# EAGLE board Teensyboard (EAGLE 9.6.2)
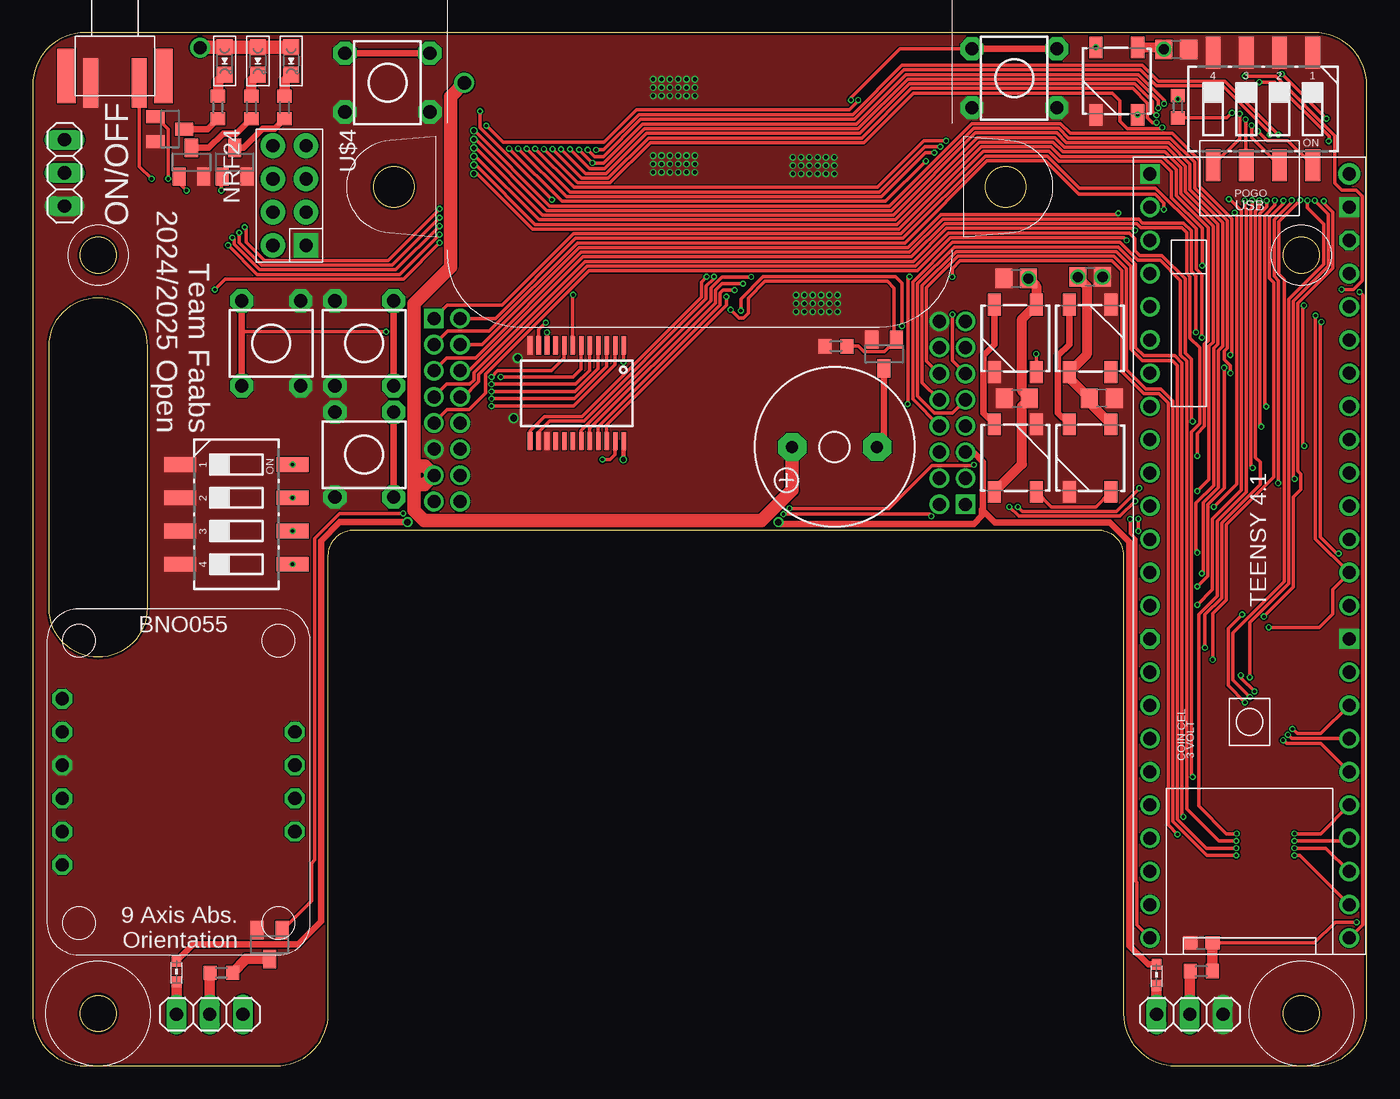
[diagram p0: board, top side]
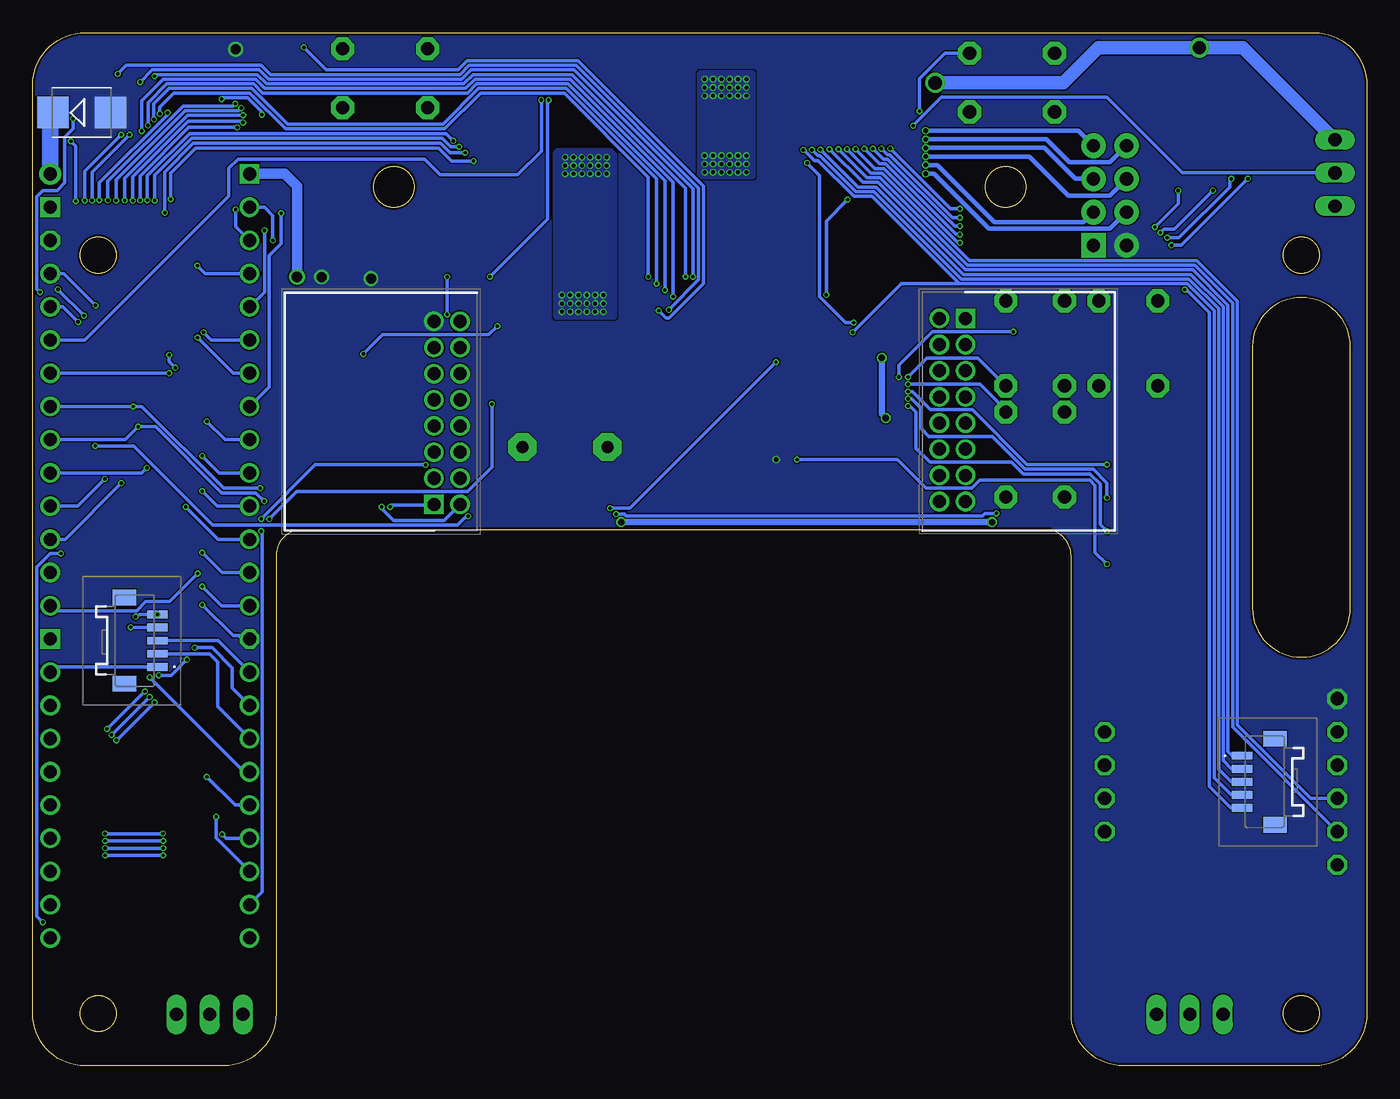
[diagram p1: board, bottom side, seen from below]

Size 102 x 79 mm. Coordinates in mm from the lower left corner, seen from the top.
Outline: 87.4,0 98,0 arc90 102,4 102,75 arc90 98,79 4,79 arc90 0,75 0,4 arc90 4,0 18.6,0 arc90 22.6,4 22.6,38.99 arc-90 24.6,40.99 81.4,40.99 arc-90 83.4,38.99 83.4,4 arc90 87.4,0
Outline: 8.75,35 arc-180 1.25,35 1.25,55 arc-180 8.75,55 8.75,35
Outline: circle at 5,62 radius 1.38
Outline: circle at 27.6,67.22 radius 1.55
Outline: circle at 74.4,67.22 radius 1.55
Outline: circle at 97,62 radius 1.38
Outline: circle at 5,4 radius 1.38
Outline: circle at 97,4 radius 1.38
Copper layers (1*16): Top 0.018mm / dielectric 1.55mm / Bottom 0.018mm
Design rules "Multi-CB_2L_100um-Tracks_OL35um": minimum track width 0.1mm, minimum drill 0.2mm, track to track 0.1mm, track to pad 0.1mm, pad to pad 0.1mm, via to via 0.1mm, smd to smd 0mil, copper to edge 0.2mm, drill to drill 0.2mm, minimum pad ring 0.125mm, minimum via ring 0.1mm, stop-mask expansion 2mil, vias tented up to drill 0.45mm, thermal gap 0.2mm
Net classes: 1 5v: width 0.813 mm, drill 0.8 mm

## Footprints (pad centres in the part's own frame; a part is rotated, then mirrored left to right if it is on the bottom)
C0805 = smd 1.3 x 1.5: 1 -0.95,0; 2 0.95,0
C0603 = smd 1.1 x 1: 1 -0.85,0; 2 0.85,0
SMB = smd 2.4 x 2.4: A 2.2,0; C -2.2,0
SPARKFUN-LED_WS2812B = smd 1.651 x 1: 1 -2.577,1.6; 2 -2.577,-1.6; 3 2.577,-1.6; 4 2.577,1.6
208659-1640_SHDRRA16W55P200_2X8_1800X1450X = drill 1 pad 1.5 square: 1 0,0 | drill 1 pad 1.5: 2 0,-2; 3 2,0; 4 2,-2; 5 4,0; 6 4,-2; 7 6,0; 8 6,-2; 9 8,0; 10 8,-2; 11 10,0; 12 10,-2; 13 12,0; 14 12,-2; 15 14,0; 16 14,-2
2035600503 = smd 0.6 x 1.55: 1 2,2.348; 2 1,2.348; 3 0,2.348; 4 -1,2.348; 5 -2,2.348 | smd 1.2 x 1.8: MP1 3.3,-0.177; MP2 -3.3,-0.177
1X03 = drill 1.016 long: 1 -2.54,0; 2 0,0; 3 2.54,0
KSM611A = drill 1.016 pad 1.778 octagon: A -3.25,2.25; B -3.25,-2.25; C 3.25,2.25; D 3.25,-2.25
0603 = smd 0.85 x 0.7: 1 -0.9,0; 2 0.7,0
POWER_DISTRIBUTION_CHIPLED_0805 = smd 1.2 x 1.2: A 0,-1.05; C 0,1.05
TIGERS_KT11 = smd 3.759 x 1.168: 1 3.581,1.854; 2 3.581,-1.854 | smd 4.191 x 1.422: MNT1 3.048,3.708; MNT2 3.048,-3.708
TRANSISTOR-SMALL-SIGNAL_SOT23 = smd 1 x 1.4: 1 -0.95,-1.1; 2 0.95,-1.1; 3 0,1.1
SOT23 = smd 1 x 1.4: 1 -0.95,-1.1; 2 0.95,-1.1; 3 0,1.1
R0603 = smd 1 x 1.1: 1 -0.85,0; 2 0.85,0
SWITCH-DIL_CTS-219-04 = smd 1.13 x 2.44: 1 -3.81,-4.3; 2 -1.27,-4.3; 3 1.27,-4.3; 4 3.81,-4.3; 5 3.81,4.3; 6 1.27,4.3; 7 -1.27,4.3; 8 -3.81,4.3
BUZZER_F/QMX = drill 0.914 pad 2.159 octagon: + 3.251,0; - -3.251,0
SPARKFUN_SSOP24 = smd 0.348 x 1.397: 1 -3.575,-3.656; 2 -2.925,-3.656; 3 -2.275,-3.656; 4 -1.625,-3.656; 5 -0.975,-3.656; 6 -0.325,-3.656; 7 0.325,-3.656; 8 0.975,-3.656; 9 1.625,-3.656; 10 2.275,-3.656; 11 2.925,-3.656; 12 3.575,-3.656; 13 3.575,3.656; 14 2.925,3.656; 15 2.275,3.656; 16 1.625,3.656; 17 0.975,3.656; 18 0.325,3.656; 19 -0.325,3.656; 20 -0.975,3.656; 21 -1.625,3.656; 22 -2.275,3.656; 23 -2.925,3.656; 24 -3.575,3.656
BNO055 = drill 1.016 octagon: 3VO -8.99,3.81; ADR 8.79,-3.81; GND -8.99,1.27; INT 8.79,-1.27; PS0 8.79,3.81; PS1 8.79,1.27; RST -8.99,-6.35; SCL -8.99,-3.81; SDA -8.99,-1.27; VIN -8.99,6.35
TEENSY_4.1_WO_EXTRAPINS = drill 1: 0-RX1/CS1/CRX2 -33.02,-7.62; 1-TX1/MISO1/CTX2 -30.48,-7.62; 2-OUT2 -27.94,-7.62; 3-LRCLK2 -25.4,-7.62; 4-BCLK2 -22.86,-7.62; 5-IN2 -20.32,-7.62; 6-OUT1D -17.78,-7.62; 7-RX2/OUT1A -15.24,-7.62; 8-TX2/IN2 -12.7,-7.62; 9-OUT1C -10.16,-7.62; 10-CS\MQSR -7.62,-7.62; 11-MOSI/CTX1 -5.08,-7.62; 12-MISO/MQSL -2.54,-7.62; 13-SCK/LED -2.54,7.62; 14-A0/TX3/SPDIF_OUT -5.08,7.62; 15-A1/RX3/SPDIF_IN -7.62,7.62; 16-A2/RX4/SCL1 -10.16,7.62; 17-A3/TX4/SDA1 -12.7,7.62; 18-A4/SDA0 -15.24,7.62; 19-A5/SCL0 -17.78,7.62; 20-A6/TX5/LRCLK1 -20.32,7.62; 21-A7/RX5/BCLK1 -22.86,7.62; 22-A8/CTX1 -25.4,7.62; 23-A9/CRX1/MCLK1 -27.94,7.62; 24-A10/TX6/SCL2 2.54,-7.62; 25-A11/RX6/SDA2 5.08,-7.62; 26-A12/MOSI1 7.62,-7.62; 27-A13/SCK1 10.16,-7.62; 28-RX7 12.7,-7.62; 29-TX7 15.24,-7.62; 30-CRX3 17.78,-7.62; 31-CTX3 20.32,-7.62; 32-OUT1B 22.86,-7.62; 33-MCLK2 22.86,7.62; 34-RX8 20.32,7.62; 35-TX8 17.78,7.62; 36-PWM 15.24,7.62; 37-PWM 12.7,7.62; 38-A14/CS/IN1 10.16,7.62; 39-A15/CS/OUT1A 7.62,7.62; 40-A16/CS1 5.08,7.62; 41-A17/MISO1 2.54,7.62 | drill 1 octagon: 3V3-1 0,-7.62; 3V3-3 -30.48,7.62 | drill 1 square: GND1 -35.56,-7.62; GND3 0,7.62; GND6 -33.02,7.62 | drill 1 pad 1.676: VIN -35.56,7.62
NRF24 = drill 1.016 pad 1.88 square: 1 3.81,1.27 | drill 1.016 pad 1.88: 2 3.81,-1.27; 3 1.27,1.27; 4 1.27,-1.27; 5 -1.27,1.27; 6 -1.27,-1.27; 7 -3.81,1.27; 8 -3.81,-1.27

## Placement (x,y rotation side)
C1  100n  [C0805]  75.19,60.2 0 top
C2  100n  [C0805]  80.84,60.33 180 top
C3  100n  [C0805]  87.42,77.73 180 top
C4  100n  [C0805]  75.26,51.03 0 top
C5  100n  [C0805]  81.73,51.06 180 top
C6  1n  [C0603]  89.35,9.4 180 top
D1  [SMB]  98.24,72.9 0 bottom
D6  [SPARKFUN-LED_WS2812B]  82.88,75.3 270 top
D7  [SPARKFUN-LED_WS2812B]  75.13,55.63 270 top
D8  [SPARKFUN-LED_WS2812B]  75.13,46.48 90 top
D9  [SPARKFUN-LED_WS2812B]  80.84,46.48 270 top
D10  [SPARKFUN-LED_WS2812B]  80.84,55.63 90 top
J1  TEENSY_CON_RIGHTANGLED  [208659-1640_SHDRRA16W55P200_2X8_1800X1450X]  30.68,57.15 270 bottom
J3  5PIN_1MM_CON  [2035600503]  94.81,32.52 270 bottom
J4  5PIN_1MM_CON  [2035600503]  7.19,21.72 90 bottom
J5  TEENSY_CON_RIGHTANGLED  [208659-1640_SHDRRA16W55P200_2X8_1800X1450X]  71.32,42.93 90 bottom
JP2  [1X03]  13.53,3.94 0 top
JP3  [1X03]  88.47,3.94 0 top
JP4  [1X03]  2.44,68.28 270 top
KNOPF-0  [KSM611A]  75.05,75.52 0 top
KNOPF-1  [KSM611A]  25.35,55.25 270 top
KNOPF-2  [KSM611A]  27.12,75.19 0 top
KNOPF-3  [KSM611A]  18.23,55.25 90 top
KNOPF-4  [KSM611A]  25.35,46.74 270 top
L6  120R  [0603]  10.99,7.12 270 top
L7  120R  [0603]  85.92,6.86 270 top
LED4  [POWER_DISTRIBUTION_CHIPLED_0805]  14.68,76.84 180 top
LED6  [POWER_DISTRIBUTION_CHIPLED_0805]  17.22,76.84 180 top
LED8  [POWER_DISTRIBUTION_CHIPLED_0805]  19.76,76.84 180 top
ON/OFF_SW  [TIGERS_KT11]  6.3,78.74 270 top
Q1  bss138  [TRANSISTOR-SMALL-SIGNAL_SOT23]  10.49,71.63 270 top
Q2  bss138  [TRANSISTOR-SMALL-SIGNAL_SOT23]  12.14,69.09 0 top
Q3  bss138  [TRANSISTOR-SMALL-SIGNAL_SOT23]  65.1,54.44 180 top
Q4  bss138  [TRANSISTOR-SMALL-SIGNAL_SOT23]  15.44,69.09 0 top
Q8  BSS138  [SOT23]  18.11,9.27 180 top
R1  10k  [R0603]  14.17,73.28 90 top
R3  10k  [R0603]  16.71,73.28 90 top
R4  10k  [R0603]  19.25,73.28 90 top
R6  5k  [R0603]  61.41,55.02 180 top
R13  470R  [R0603]  87.55,73.33 270 top
R15  1k  [R0603]  89.35,7.24 180 top
R16  47R  [R0603]  14.42,7.12 180 top
S1  DEBUG_DILSW  [SWITCH-DIL_CTS-219-04]  15.57,42.17 270 top
S2  DEBUG_DILSW  [SWITCH-DIL_CTS-219-04]  94.05,73.16 180 top
SG1  DEBUG_BUZZER  [BUZZER_F/QMX]  61.31,47.32 180 top
U$1  MULTIPLEXER_MUX-74HC4067SMD  [SPARKFUN_SSOP24]  41.6,51.44 180 top
U$2  BNO055  [BNO055]  11.25,21.72 0 top
U$3  TEENSY_4.1_WO_EXTRAPINS  [TEENSY_4.1_WO_EXTRAPINS]  93.04,32.64 270 top
U$4  NRF24  [NRF24]  19.63,66.55 270 top

## Library data of the parts
C1-C6 = rcl; SPICEPREFIX: C
D1 = diode
D6-D10 = Open24; PROD_ID: DIO-12503
J1 J5 = Open24; DESCRIPTION: IGRID2.0 PLUGTHOLEHDR RA GF NAT 16CKT; HEIGHT: 8.5mm; MANUFACTURER_NAME: Molex; MANUFACTURER_PART_NUMBER: 208659-1640; MOUSER_PART_NUMBER: 538-208659-1640; MOUSER_PRICE-STOCK: https://www.mouser.co.uk/ProductDetail/Molex/208659-1640?qs=GedFDFLaBXEVd%2F074iDEfw%3D%3D
J3 J4 = 5PinConnector; DESCRIPTION: Headers & Wire Housings PicoClasp Hdr SMT SR Vrt 5Ckt OPL Au0.38; HEIGHT: 5.61mm; MANUFACTURER_NAME: Molex; MANUFACTURER_PART_NUMBER: 203560-0503; MOUSER_PART_NUMBER: 538-203560-0503; MOUSER_PRICE-STOCK: https://www.mouser.co.uk/ProductDetail/Molex/203560-0503?qs=F5EMLAvA7IDMlfZodDQB8w%3D%3D
JP2-JP4 = pinhead
KNOPF-0 KNOPF-1-KNOPF-4 = schalter_taster
L6 L7 = wuerth-elektronik
LED4 LED6 LED8 = Open24; MF: Würth Elektronik; MPN: 150080GS75000
ON/OFF_SW Q1-Q4 U$1 = Open24
Q8 = transistor-small-signal
R1 R3 R4 R6 R13 R15 R16 = rcl; SPICEPREFIX: R
S1 S2 SG1 = Open24; OC_FARNELL: unknown; OC_NEWARK: unknown
U$2 U$3 = Libsammlung
U$4 = nrf24

## Nets
+3V3: J5.5 L6.1 L7.1
+5V: C1.2 C2.2 C3.2 C4.2 C5.2 D1.A D6.1 D7.1 D8.1 D9.1 D10.1 J5.15 U$1.24 U$2.VIN U$4.2
+12V: J1.13 JP4.1 LED4.A LED6.A LED8.A SG1.+
ALRT: J5.4
BODEN_0: J3.3 U$3.24-A10/TX6/SCL2
BODEN_1: J4.5 U$3.25-A11/RX6/SDA2
BODEN_2: J3.2 U$3.26-A12/MOSI1
BODEN_3: J4.3 U$3.27-A13/SCK1
BODEN_4: J3.1 U$3.41-A17/MISO1
BODEN_5: J4.1 U$3.40-A16/CS1
BUZZER: Q3.1 R6.1 U$3.33-MCLK2
CE: U$3.9-OUT1C U$4.3
COMMUNICATION_MOD: JP4.2 U$3.21-A7/RX5/BCLK1
CSN: U$3.8-TX2/IN2 U$4.4
D_OUTPUT: U$1.1 U$3.31-CTX3
DIP_0: S1.8 U$1.4
DIP_1: S1.7 U$1.3
DIP_2: S1.6 U$1.2
DIP_3: S1.5 U$1.23
DIP_4: S2.8 U$1.22
DIP_5: S2.7 U$1.21
DIP_6: S2.6 U$1.20
DIP_7: S2.5 U$1.19
DRIBBLER_DIR: J5.9 U$3.30-CRX3
DRIBBLER_PWM: J5.11 U$3.29-TX7
DRIVE_EN: J1.9 U$3.0-RX1/CS1/CRX2
EN_HV: J5.12 U$3.34-RX8
GND: C1.1 C2.1 C3.1 C4.1 C5.1 C6.2 D6.3 D7.3 D8.3 D9.3 D10.3 J1.11 J5.16 JP3.3 JP4.3 KNOPF-0.B KNOPF-0.D KNOPF-1.B KNOPF-1.D KNOPF-2.B KNOPF-2.D KNOPF-3.B KNOPF-3.D KNOPF-4.B KNOPF-4.D ON/OFF_SW.2 Q1.2 Q2.2 Q3.2 Q4.2 Q8.2 R6.2 S1.1 S1.2 S1.3 S1.4 S2.1 S2.2 S2.3 S2.4 U$1.12 U$1.15 U$2.GND U$3.GND1 U$3.GND3 U$3.GND6 U$4.1
HV_SENSING: J5.13
I2C_SCL: J5.2 U$2.SCL U$3.19-A5/SCL0
I2C_SDA: J5.1 U$2.SDA U$3.18-A4/SDA0
IR_ADC: C6.1 R15.1 U$3.22-A8/CTX1
IR_LED: Q8.1 U$3.23-A9/CRX1/MCLK1
IRQ: U$3.20-A6/TX5/LRCLK1 U$4.8
K0: KNOPF-0.A KNOPF-0.C U$3.32-OUT1B
K1: KNOPF-1.A KNOPF-1.C U$1.8
K2: KNOPF-2.A KNOPF-2.C U$1.7
K3: KNOPF-3.A KNOPF-3.C U$1.6
K4: KNOPF-4.A KNOPF-4.C U$1.5
LED1: Q1.1 U$3.37-PWM
LED2: Q2.1 U$3.10-CS\MQSR
LED_KICKERBOARD: J5.14
M_HL_DIR: J1.6 U$3.28-RX7
M_HL_PWM: J1.5 U$3.4-BCLK2
M_HR_DIR: J1.8 U$3.7-RX2/OUT1A
M_HR_PWM: J1.7 U$3.3-LRCLK2
M_VL_DIR: J1.4 U$3.6-OUT1D
M_VL_PWM: J1.1 U$3.2-OUT2
M_VR_DIR: J1.2 U$3.5-IN2
M_VR_PWM: J1.3 U$3.1-TX1/MISO1/CTX2
N$1: LED8.C R4.2
N$5: LED4.C R1.2
N$7: LED6.C R3.2
N$8: Q1.3 R1.1
N$9: Q4.3 R4.1
N$12: J1.10
N$13: Q2.3 R3.1
N$15: Q3.3 SG1.-
N$19: D6.4 R13.1
N$20: D6.2 D7.4
N$21: D7.2 D8.4
N$22: D8.2 D9.4
N$23: D9.2 D10.4
N$24: J1.12
N$25: J1.14
N$26: J1.16
N$40: JP3.2 R15.2
N$52: D1.C U$3.VIN
N$53: Q8.3 R16.1
N$54: JP2.2 R16.2
N$77: JP3.1 L7.2
N$96: JP2.1 L6.2
NEOPIXELS: R13.2 U$3.39-A15/CS/OUT1A
ON/OFF-BUTTON: ON/OFF_SW.1 U$3.17-A3/TX4/SDA1
S0: J4.4 U$1.10 U$3.16-A2/RX4/SCL1
S1: J4.2 U$1.11 U$3.15-A1/RX3/SPDIF_IN
S2: J3.4 U$1.14 U$3.14-A0/TX3/SPDIF_OUT
S3: J3.5 U$1.13 U$3.38-A14/CS/IN1
SCHUSS_1: J5.8 U$3.36-PWM
SCHUSS_2: J5.10 U$3.35-TX8
SPI_MISO: U$3.12-MISO/MQSL U$4.7
SPI_MOSI: U$3.11-MOSI/CTX1 U$4.6
SPI_SCK: U$3.13-SCK/LED U$4.5
T_EN: Q4.1 U$3.3V3-1

## Tracks (layer width: path | path; a pad name or v marks a point on that pad's centre or on a via)
+3V3  (via drill 0.51)
  Top 0.508: L7.1 85.28,7.76 83.85,9.19 83.85,40.07 82.37,41.56 73.58,41.56 72.67,42.47 | J5.5 71.9,46.93 72.67,46.17 72.67,42.47 | 72.67,42.47 72.59,42.55 72.59,42.08 71.95,41.44 57.14,41.44 v57.01,41.57 | v28.65,41.57 23.48,41.57 22.04,40.13 22.04,11.05 20.28,9.29 12.27,9.29 L6.1
  Bottom 0.508: v57.01,41.57 v28.65,41.57
+5V  (via drill 0.36, 0.76)
  Top 0.356: U$1.24 45.18,46.38 v45.16,46.36
  Top 0.762: C1.2 76.73,59.61 D7.1 75.64,57.11 75.64,51.6 C4.2 75.64,50.46 75.64,46.02 D8.1 | D9.1 80.78,50.72 C5.2 79.25,52.6 D10.1 80.59,54.4 80.59,59.63 C2.2 | D6.1 86.32,77.88 C3.2
  other vias: 76.14,60.2 86.47,77.73 79.89,60.33
  pour Bottom (rank 2, no thermals): -3.74,76.84 -3.74,-1.65 -1.45,-3.93 103.96,-3.93 105.86,-2.03 105.86,77.6 102.05,81.41 0.84,81.41
+12V  (via drill 1.02)
  Top 1.016: SG1.+ 58.06,44.02 55.74,41.7 29.92,41.7 29.16,42.46 29.16,44.45 | 29.16,44.45 29.16,45.85 | 29.16,45.85 29.16,58.3 31.95,61.09 31.95,74.12 v32.99,75.16 | LED8.A LED6.A LED4.A 12.83,77.89 v12.8,77.85 | 29.16,44.45 29.98,44.45 J1.13 29.98,45.85 29.16,45.85
  Bottom 1.016: JP4.1 9.47,77.85 v12.8,77.85 20.52,77.85 23.21,75.16 v32.99,75.16
BODEN_0
  Bottom 0.254: J3.3 87.83,32.52 U$3.24-A10/TX6/SCL2
BODEN_1  (via drill 0.25)
  Top 0.254: v13.92,59.35 14.73,60.16 28.34,60.16 v31.11,62.93 | v39.09,70.11 41.67,67.52 44.14,67.52 47.22,70.6 63.55,70.6 67.34,74.38 82.54,74.38 83.11,73.81 83.11,72.24 83.69,71.66 86.26,71.66 v86.36,71.76 | v93.79,66.18 93.79,65.67 93.48,65.36 93.48,46.53 93.85,46.16 93.85,44.47 90.91,41.53 90.91,35.78 89.63,34.5 v89.63,31.98
  Bottom 0.254: U$3.25-A11/RX6/SDA2 86.75,28.89 86.75,30.44 88.28,31.98 v89.63,31.98 | J4.5 10.39,19.72 12.03,21.36 12.03,57.6 13.78,59.35 v13.92,59.35 | v31.11,62.93 31.13,62.95 31.27,62.95 36.93,68.61 37.6,68.61 v39.09,70.11 | v86.36,71.76 90.06,71.76 93.79,68.03 v93.79,66.18
BODEN_2
  Bottom 0.254: U$3.26-A12/MOSI1 87.86,27.47 87.86,30.9 88.48,31.52 J3.2
BODEN_3  (via drill 0.25)
  Top 0.254: v42.43,70.05 42.94,69.54 43.65,69.54 46.48,72.37 62.82,72.37 66.61,76.15 84.7,76.15 85.92,74.93 91,74.93 94.6,71.34 v94.6,71.2 | v97.47,66.17 97.47,65.61 98.7,64.37 98.7,61.3 96.03,58.62 96.03,36.89 93.05,33.91 v93.05,29.71
  Bottom 0.254: J4.3 10.36,21.72 11.32,22.68 11.32,57.89 13.59,60.16 30.99,60.16 37.68,66.84 39.08,66.84 41.82,69.59 41.97,69.59 v42.43,70.05 | v94.6,71.2 97.47,68.33 v97.47,66.17 | U$3.27-A13/SCK1 85.82,22.48 v93.05,29.71
BODEN_4
  Bottom 0.254: J3.1 100.24,30.52 U$3.41-A17/MISO1
BODEN_5  (via drill 0.25)
  Top 0.254: U$3.40-A16/CS1 98.5,25.4 96.67,25.4 v96.31,25.76 | v41.08,70.09 42.58,68.59 43.7,68.59 46.78,71.66 63.11,71.66 66.9,75.44 84.4,75.44 86.05,73.8 v86.05,73.24 | v95.63,66.16 95.63,65.93 94.56,64.87 94.56,60.23 94.89,59.9 94.89,45.01 91.26,41.38 91.26,35.63 90.22,34.59 v90.22,31.06 | v93.42,28.63 92.37,29.68 v92.37,29.86
  Bottom 0.254: J4.1 10.3,23.72 10.61,24.04 10.61,58.18 13.3,60.87 30.7,60.87 37.38,67.55 38.54,67.55 v41.08,70.09 | v86.05,73.24 86.25,73.04 90.35,73.04 95.63,67.76 v95.63,66.16 | v90.22,31.06 91.41,29.86 v92.37,29.86 | v93.42,28.63 96.29,25.76 v96.31,25.76
BUZZER  (via drill 0.25)
  Top 0.254: U$3.33-MCLK2 101.67,10.8 101.67,58.93 v101.44,59.16 | v98.92,72.43 v95.5,75.85 | v53.37,57.81 53.98,57.19 54.34,57.19 54.71,57.56 54.71,58.71 55.99,59.99 65.33,59.99 65.86,59.46 65.86,55.72 Q3.1 65.12,54.61 63.55,54.61 63.14,55.02 R6.1
  Bottom 0.254: v101.44,59.16 101.67,59.39 101.67,66.47 101.22,66.93 100.12,66.93 99.54,67.52 99.54,71.02 98.92,71.64 v98.92,72.43 | v95.5,75.85 94.84,76.51 84.53,76.51 83.82,75.8 69.34,75.8 68.64,76.51 60.47,76.51 51.08,67.11 51.08,60.13 53.37,57.84 v53.37,57.81
CE  (via drill 0.25, 0.36)
  Top 0.254: v33.73,68.88 33.88,68.88 38.42,64.34 66.09,64.34 72.38,70.63 78,70.63 78.75,69.89 86.55,69.89 87.78,68.66 87.78,66.69 90.25,64.21 90.25,55.34 89.94,55.03 89.94,44.84 v89.04,43.95
  Bottom 0.254: v89.04,43.95 87.9,42.8 U$3.9-OUT1C
  Bottom 0.356: U$4.3 21.66,64.52 28.47,64.52 32.84,68.88 v33.73,68.88
COMMUNICATION_MOD  (via drill 0.25)
  Top 0.254: v34.68,71.89 35.95,70.62 43.67,70.62 46.16,73.1 62.45,73.1 63.11,73.76 v63.11,73.85
  Bottom 0.254: JP4.2 14.09,68.28 19.87,74.05 32.52,74.05 v34.68,71.89 | U$3.21-A7/RX5/BCLK1 98.02,55.5 87.02,66.5 87.02,68.63 86.31,69.34 72.03,69.34 70.84,68.15 64.92,68.15 63.11,69.96 v63.11,73.85
CSN  (via drill 0.25, 0.36)
  Top 0.254: v33.73,68.23 33.98,68.23 38.22,63.98 66.23,63.98 72.53,70.28 77.86,70.28 78.6,69.53 86.41,69.53 87.42,68.52 87.42,66.54 89.87,64.09 89.87,55.47 89.58,55.18 89.58,48.91 89.04,48.37 v89.04,46.64
  Bottom 0.254: v89.04,46.64 87.74,45.34 U$3.8-TX2/IN2
  Bottom 0.356: U$4.4 19.63,64.01 28.88,64.01 33.09,68.23 v33.73,68.23
D_OUTPUT  (via drill 0.25)
  Top 0.254: U$1.1 v45.18,53.83 v45.17,53.82 | v57.86,42.63 65.46,42.63 68.74,45.91 71.91,45.91 v71.96,45.96 | v84.53,41.82 v84.53,40.89
  Bottom 0.254: U$3.31-CTX3 84.44,13.3 84.44,40.8 v84.53,40.89 | v45.17,53.82 56.33,42.66 57.83,42.66 v57.86,42.63 | v71.96,45.96 80.39,45.96 v84.53,41.82
DIP_0  (via drill 0.25)
  Top 0.254: U$1.4 43.23,53.32 41.47,51.56 v35.07,51.56
  Bottom 0.254: S1.8 25.98,45.98 30.17,50.17 33.35,50.17 34.74,51.56 v35.07,51.56
  other vias: 19.87,45.98
DIP_1  (via drill 0.25)
  Top 0.254: U$1.3 43.88,53.47 41.41,51.01 v35.07,51.01
  Bottom 0.254: S1.7 19.87,44.58 20.91,45.62 26.13,45.62 28.64,48.14 33.47,48.14 34.11,48.77 34.11,50.3 34.82,51.01 v35.07,51.01
  other vias: 19.87,43.44
DIP_2  (via drill 0.25)
  Top 0.254: U$1.2 44.53,53.62 41.36,50.46 v35.07,50.46
  Bottom 0.254: S1.6 20.38,41.41 20.38,44.49 21.16,45.27 26.27,45.27 27.18,46.18 33.42,46.18 34.46,47.22 34.46,49.98 34.94,50.46 v35.07,50.46
  other vias: 19.87,40.9
DIP_3  (via drill 0.25)
  Top 0.254: U$1.23 44.53,46.74 44.14,46.36 v43.56,46.36
  Bottom 0.254: S1.5 20.77,39.26 20.77,44.39 21.19,44.8 29.57,44.8 30.2,44.18 33.7,44.18 35.89,46.36 v43.56,46.36
  other vias: 19.87,38.36
DIP_4  (via drill 0.25)
  Top 0.254: U$1.22 43.88,49.01 53.03,58.17 v53.03,58.82 | S2.8 95.98,70.74 94.41,70.74 v93.67,71.48
  Bottom 0.254: v53.03,58.82 53.03,67.57 60.91,75.44 68.19,75.44 68.9,74.74 84.26,74.74 84.97,75.44 92.02,75.44 93.67,73.8 v93.67,71.48
DIP_5  (via drill 0.25)
  Top 0.254: U$1.21 43.23,48.87 52.55,58.19 52.55,59.09 52.78,59.31 v53.67,59.31 | S2.7 93.19,70.99 v93.19,71.91
  Bottom 0.254: v53.67,59.31 53.67,67.7 61.06,75.09 68.05,75.09 68.76,74.38 84.41,74.38 85.12,75.09 91.74,75.09 93.19,73.65 v93.19,71.91
DIP_6  (via drill 0.25)
  Top 0.254: U$1.20 42.58,48.72 52.2,58.34 52.2,59.31 52.7,59.82 v54.3,59.82 | S2.6 92.73,68.91 v92.73,72.37
  Bottom 0.254: v54.3,59.82 54.3,67.84 61.2,74.74 67.9,74.74 70.64,72 82.53,72 85.26,74.74 91.58,74.74 92.73,73.59 v92.73,72.37
DIP_7  (via drill 0.25)
  Top 0.254: U$1.19 41.93,48.59 51.84,58.5 51.84,59.46 52.71,60.33 v54.94,60.33 | v92.28,72.8 92.28,70.89 S2.5
  Bottom 0.254: v54.94,60.33 54.94,67.97 61.35,74.38 67.75,74.38 70.49,71.65 82.67,71.65 85.41,74.38 91.21,74.38 92.28,73.32 v92.28,72.8
DRIBBLER_DIR  (via drill 0.25)
  Top 0.254: J5.9 70.31,49.91 68.95,49.91 67.64,51.23 67.64,59.8 70.46,62.62 82.99,62.62 84.32,61.29 84.32,54.94 84.97,54.29 87.33,54.29 87.88,53.74 87.88,19.15 v87.98,19.05
  Bottom 0.254: v87.98,19.05 87.98,17.42 U$3.30-CRX3
DRIBBLER_PWM  (via drill 0.25)
  Top 0.254: J5.11 70.3,53.95 70.3,57.44 v70.32,57.45 | v87.52,17.7 86.81,18.41 86.81,50.68 86.09,51.4 84.95,51.4 83.26,53.09 83.26,60.8 82.5,61.56 70.9,61.56 70.3,60.96 v70.3,60.33
  Bottom 0.254: v87.52,17.7 87.22,17.4 U$3.29-TX7 | v70.32,57.45 70.32,60.31 v70.3,60.33
DRIVE_EN  (via drill 0.25)
  Top 0.254: J1.9 31.7,50.17 33.35,50.17 34.62,51.44 34.62,52.89 42.52,60.8 67.64,60.8 70.17,63.33 83.42,63.33 v83.63,63.12
  Bottom 0.254: v83.63,63.12 83.63,65.02 84.27,65.66 U$3.0-RX1/CS1/CRX2
EN_HV  (via drill 0.25)
  Top 0.254: J5.12 68.34,53.91 68.34,59.5 70.75,61.91 82.64,61.91 83.61,60.94 83.61,53.24 85.09,51.75 86.24,51.75 87.17,50.82 87.17,18.7 89.77,16.1 v92.02,16.1 | v96.47,16.1 96.88,16.1 U$3.34-RX8
  Bottom 0.254: v92.02,16.1 v96.47,16.1
GND  (via drill 0.3, 0.51, 0.81)
  Bottom 0.508: v36.78,49.53 37.08,49.84 v37.08,54.13
  Bottom 0.813: v81.8,60.33 81.8,67.25 82.75,68.2 U$3.GND1
  other vias: 58.75,68.2 58.11,68.84 58.11,69.47 58.75,69.47 59.38,69.47 60.02,69.47 60.65,69.47 61.29,69.47 61.29,68.84 60.65,68.84 60.02,68.84 59.38,68.84 58.75,68.84 58.11,68.2 59.38,68.2 60.02,68.2 60.65,68.2 61.29,68.2 48.08,68.33 47.44,68.96 47.44,69.6 48.08,69.6 48.71,69.6 49.35,69.6 49.98,69.6 50.62,69.6 50.62,68.96 49.98,68.96 49.35,68.96 48.71,68.96 48.08,68.96 47.44,68.33 48.71,68.33 49.35,68.33 49.98,68.33 50.62,68.33 48.08,74.17 47.44,74.81 47.44,75.44 48.08,75.44 48.71,75.44 49.35,75.44 49.98,75.44 50.62,75.44 50.62,74.81 49.98,74.81 49.35,74.81 48.71,74.81 48.08,74.81 47.44,74.17 48.71,74.17 49.35,74.17 49.98,74.17 50.62,74.17 59,57.66 58.37,58.3 58.37,58.93 59,58.93 59.64,58.93 60.27,58.93 60.91,58.93 61.54,58.93 61.54,58.3 60.91,58.3 60.27,58.3 59.64,58.3 59,58.3 58.37,57.66 59.64,57.66 60.27,57.66 60.91,57.66 61.54,57.66
  pour Top (no thermals): -3.1,68.96 -3.1,-1.01 -0.94,-3.17 102.69,-3.17 104.85,-1.01 104.85,77.47 101.67,80.65 0.96,80.65 -2.59,77.09 -3.1,76.58
  pour Bottom (no thermals): 57.35,57.28 57.35,69.73 57.73,70.11 61.92,70.11 62.18,69.85 62.18,57.28 62.05,57.15 57.48,57.15
  pour Bottom (no thermals): 46.81,75.95 46.81,67.95 46.94,67.82 51,67.82 51.13,67.95 51.13,75.95 51,76.08 46.94,76.08
I2C_SCL  (via drill 0.25)
  Top 0.254: v75.32,42.75 75.67,42.39 82.86,42.39 84.62,44.16 v84.61,44.17 | v40.4,70.1 42.27,68.23 43.85,68.23 46.92,71.31 63.26,71.31 67.05,75.09 84.26,75.09 85.59,73.75 85.59,72.99 85.9,72.69 v85.92,72.69 | v94.97,66.17 94.97,65.79 94.19,65.01 94.19,50.54 v94.31,50.42
  Bottom 0.254: v75.32,42.75 75.32,42.62 74.39,41.7 70.55,41.7 J5.2 | U$2.SCL 10.26,25.91 10.26,58.33 13.15,61.22 30.55,61.22 37.24,67.91 38.21,67.91 v40.4,70.1 | v85.92,72.69 90.16,72.69 94.97,67.88 v94.97,66.17 | U$3.19-A5/SCL0 v94.32,50.42 v94.31,50.42 93.65,50.42 87.41,44.17 v84.61,44.17
I2C_SDA  (via drill 0.25)
  Top 0.254: v74.68,42.75 75.38,42.04 83.13,42.04 84.29,43.2 v84.3,43.18 | v39.75,70.11 41.98,67.88 44,67.88 47.07,70.95 63.41,70.95 67.19,74.74 84.11,74.74 85.24,73.61 85.24,72.49 85.59,72.13 v85.92,72.13 | v94.34,66.16 94.34,65.68 93.83,65.17 93.83,48.97 v93.93,48.87
  Bottom 0.254: J5.1 71.37,42.88 74.55,42.88 v74.68,42.75 | U$2.SDA 4.3,20.45 9.91,26.06 9.91,58.48 13,61.57 30.4,61.57 37.09,68.26 37.9,68.26 v39.75,70.11 | v85.92,72.13 86.01,72.22 90.12,72.22 94.34,67.99 v94.34,66.16 | U$3.18-A4/SDA0 94.92,47.88 v93.93,48.87 92.61,48.87 87.55,43.82 84.94,43.82 v84.3,43.18
IR_ADC  (via drill 0.25)
  Top 0.254: v99.85,39.17 99.71,39.17 98.43,40.45 98.43,56.78 v98.53,56.89 | v101.22,10.99 99.58,10.99 97.99,9.4 C6.1
  Top 0.813: R15.1 C6.1
  Bottom 0.254: v99.85,39.17 100.65,39.17 101.67,38.15 101.67,11.44 v101.22,10.99 | U$3.22-A8/CTX1 99.69,58.04 v98.53,56.89
IR_LED  (via drill 0.25)
  Top 0.254: Q8.1 21.31,12.63 21.31,15.5 21.56,15.75 21.56,40.33 23.48,42.25 v28.32,42.25 | v57.4,42.18 68.55,42.18 v68.7,42.03 | v97.22,47.4 97.12,47.5 97.12,58.07 v97.19,58.14
  Bottom 0.254: v28.32,42.25 29.2,42.25 29.4,42.05 56.63,42.05 56.76,42.18 v57.4,42.18 | v68.7,42.03 68.84,42.03 69.52,41.34 88.23,41.34 94.28,47.4 v97.22,47.4 | U$3.23-A9/CRX1/MCLK1 99.63,60.58 v97.19,58.14
IRQ  (via drill 0.25, 0.36)
  Top 0.254: v33.73,70.85 33.85,70.85 39.3,65.4 65.65,65.4 71.94,71.7 78.44,71.7 79.19,70.95 86.99,70.95 88.84,69.11 88.84,67.13 91.34,64.63 91.34,54.88 91.11,54.66 91.11,54.01 91.58,53.55 v91.58,52.96
  Bottom 0.254: U$3.20-A6/TX5/LRCLK1 v91.58,52.96
  Bottom 0.356: U$4.8 19.63,69.09 22.75,69.09 24.51,70.85 v33.73,70.85
K0  (via drill 0.25)
  Top 0.254: U$3.32-OUT1B 84.43,10.77 84.43,14.02 84.34,14.11 84.34,40.27 83.91,40.7 v83.91,41.8 | v66.9,50.6 66.93,50.63 66.93,60.23 v67.04,60.34 | v62.56,73.85 62.56,74.03 66.29,77.77 KNOPF-0.A
  Top 0.508: KNOPF-0.C KNOPF-0.A
  Bottom 0.254: v83.91,41.8 81.8,43.91 68.77,43.91 66.9,45.78 v66.9,50.6 | v67.04,60.34 67.04,60.35 62.63,64.76 62.63,73.85 v62.56,73.85
K1  (via drill 0.25)
  Top 0.254: v35.07,52.67 35.55,53.16 39.68,53.16 40.63,54.1 U$1.8
  Top 0.508: KNOPF-1.A KNOPF-1.C
  Bottom 0.254: KNOPF-1.C 29.73,54.13 33.61,54.13 v35.07,52.67
K2  (via drill 0.25)
  Top 0.254: U$1.7 41.28,58.91 v41.32,58.96 | v39.7,66.23 34.23,71.7 34.23,71.71 34.21,71.73 v34.21,73
  Top 0.508: KNOPF-2.C KNOPF-2.A
  Bottom 0.254: v41.32,58.96 41.32,64.61 v39.7,66.23 | v34.21,73 34.21,75.47 32.24,77.44 KNOPF-2.C
K3  (via drill 0.25)
  Top 0.254: U$1.6 41.93,53.29 41.31,52.67 v35.78,52.67 | v27.02,56.14 15.98,56.14
  Top 0.508: KNOPF-3.C 15.98,56.14 KNOPF-3.A
  Bottom 0.254: v35.78,52.67 35.78,53.57 33.22,56.14 v27.02,56.14
K4  (via drill 0.25)
  Top 0.254: U$1.5 42.58,53.17 41.52,52.12 v35.07,52.12
  Top 0.508: KNOPF-4.A KNOPF-4.C
  Bottom 0.254: KNOPF-4.A 27.6,50.13 29.59,52.13 v35.06,52.13 v35.07,52.12
LED1  (via drill 0.25)
  Top 0.254: Q1.1 10.36,71.61 v10.36,67.82 | v69.39,70.28 68.2,70.28 64.73,66.82 41.09,66.82 v37.77,70.14 | v31.11,64.22 27.77,60.87 17.34,60.87 15.39,62.81 15.39,63.2 v15.26,63.32 | v92.68,66.17 92.68,65.63 92.77,65.54 92.77,43.89 90.55,41.67 90.55,35.92 89.15,34.52 89.15,19.88 91.27,17.76 v92.05,17.76 | v96.47,17.76 98.47,17.76 U$3.37-PWM
  Bottom 0.254: v69.39,70.28 70.05,70.28 70.68,70.92 89.86,70.92 92.68,68.1 v92.68,66.17 | v37.77,70.14 36.96,69.32 36.64,69.32 31.51,64.19 31.14,64.19 v31.11,64.22 | v92.05,17.76 v96.47,17.76 | v10.36,67.82 10.49,67.7 10.49,67.21 14.37,63.32 v15.26,63.32
LED2  (via drill 0.25)
  Top 0.254: v68.93,69.83 68.25,69.83 64.88,66.46 40.8,66.46 v37.12,70.14 | v91.89,65.23 91.89,65.21 92.06,65.04 92.06,44.5 v90.3,42.74 | v31.11,64.86 27.48,61.22 17.51,61.22 15.78,62.95 v15.78,63.72 | v11.76,66.93 11.19,67.5 Q2.1
  Bottom 0.254: v68.93,69.83 70.1,69.83 70.81,70.54 89.73,70.54 91.92,68.35 91.92,65.26 v91.89,65.23 | v90.3,42.74 87.82,40.26 U$3.10-CS\MQSR | v37.12,70.14 37.09,70.14 36.64,69.69 36.5,69.69 31.69,64.88 31.13,64.88 v31.11,64.86 | v15.78,63.72 15.52,63.97 14.72,63.97 v11.76,66.93
M_HL_DIR  (via drill 0.25)
  Top 0.254: J1.6 33.37,53.15 42.08,61.86 67.2,61.86 69.73,64.39 84.42,64.39 84.71,64.1 87.84,64.1 88.23,63.71 88.23,60.61 88.49,60.36 88.49,55.66 89.23,54.92 89.23,49.1 88.58,48.46 88.58,22.2 v88.68,22.1
  Bottom 0.254: v88.68,22.1 86.53,19.94 U$3.28-RX7
M_HL_PWM  (via drill 0.25)
  Top 0.254: J1.5 31.66,54.13 33.85,54.13 41.94,62.21 67.05,62.21 69.58,64.75 84.56,64.75 84.85,64.45 87.99,64.45 88.59,63.86 88.59,60.76 88.94,60.4 v88.94,56.09
  Bottom 0.254: v88.94,56.09 88.36,55.5 U$3.4-BCLK2
M_HR_DIR  (via drill 0.25)
  Top 0.254: J1.8 32.93,51.15 34.08,52.31 34.08,52.86 42.37,61.15 67.49,61.15 70.02,63.68 83.84,63.68 84.27,63.25 84.27,62.34 84.66,61.95 86.34,61.95 88.11,60.19 88.11,54.51 88.59,54.03 88.59,49.37 v88.68,49.28
  Bottom 0.254: v88.68,49.28 87.29,47.88 U$3.7-RX2/OUT1A
M_HR_PWM  (via drill 0.25)
  Top 0.254: J1.7 31.66,52.13 33.4,52.13 33.73,52.45 33.73,53.01 42.23,61.51 67.34,61.51 69.87,64.04 84.13,64.04 v84.28,63.88
  Bottom 0.254: v84.28,63.88 84.28,59.18 U$3.3-LRCLK2
M_VL_DIR  (via drill 0.25)
  Top 0.254: J1.4 34.37,55.15 41.79,62.57 66.9,62.57 69.43,65.1 82.9,65.1 v83,65.2
  Bottom 0.254: v83,65.2 83,62.87 83.93,61.95 83.93,51.91 U$3.6-OUT1D
M_VL_PWM  (via drill 0.25)
  Top 0.254: J1.1 31.7,58.17 35.89,58.17 41.35,63.63 66.38,63.63 72.68,69.93 77.71,69.93 78.46,69.18 86.26,69.18 87.07,68.37 87.07,66.39 89.42,64.05 v89.42,61.19
  Bottom 0.254: v89.42,61.19 88.81,60.58 U$3.2-OUT2
M_VR_DIR  (via drill 0.25)
  Top 0.254: J1.2 35.37,57.15 41.49,63.28 66.53,63.28 72.82,69.57 77.56,69.57 80.02,67.12 85.84,67.12 88.96,64 88.96,60.92 89.4,60.49 v89.4,55.69
  Bottom 0.254: v89.4,55.69 86.68,52.97 U$3.5-IN2
M_VR_PWM  (via drill 0.25)
  Top 0.254: J1.3 31.7,56.18 34.89,56.18 41.64,62.92 66.67,62.92 72.97,69.22 77.42,69.22 80,66.64 85.82,66.64 86.48,65.98 v86.48,65.48
  Bottom 0.254: v86.48,65.48 86.48,64.19 U$3.1-TX1/MISO1/CTX2
N$1
  Top 0.813: LED8.C 19.25,75.28 R4.2
N$5
  Top 0.813: LED4.C 14.17,75.28 R1.2
N$7
  Top 0.813: R3.2 16.71,75.28 LED6.C
N$8
  Top 0.508: R1.1 13.37,71.63 Q1.3
N$9
  Top 0.508: R4.1 18.49,71.67 17.6,71.67 16.12,70.19 Q4.3
N$13
  Top 0.508: R3.1 15.57,71.29 14.55,71.29 13.45,70.19 Q2.3
N$15
  Top 0.508: Q3.3 65.1,47.86 SG1.-
N$19  (via drill 0.25)
  Top 0.254: v87.55,73.93 R13.1
  Bottom 0.254: D6.4 84.48,72.95 85.55,74.03 87.45,74.03 v87.55,73.93
  other vias: 84.48,72.72
N$20  (via drill 0.25)
  Top 0.254: v54.14,57.75 54.14,58.64 55.84,60.35 65.97,60.35 66.47,59.84 v66.47,56.56 | v76.73,54.44 D7.4 | D7.4
  Bottom 0.254: D6.2 79.55,76.15 69.49,76.15 68.78,76.86 60.32,76.86 50.72,67.26 50.72,59.81 53.34,57.2 53.58,57.2 v54.14,57.75 | v66.47,56.56 67.13,55.91 75.26,55.91 v76.73,54.44
  other vias: 81.28,77.88
N$21
  Top 0.508: D8.4 72.68,49.92 72.68,54.3 73.53,55.16 D7.2
N$22
  Top 0.254: D8.2 77.89,42.75 81.28,42.75 D9.4
N$23
  Top 0.508: D10.4 79.25,55.16 78.39,54.3 78.39,49.92 D9.2
N$40
  Top 0.813: R15.2 88.47,7.2 JP3.2
N$52
  Bottom 1.27: D1.C 100.66,72.69 U$3.VIN
N$53
  Top 0.813: Q8.3 16.33,8.17 R16.1
N$54
  Top 0.813: JP2.2 13.53,7.08 R16.2
N$77
  Top 0.813: JP3.1 L7.2
N$96
  Top 0.813: L6.2 JP2.1
NEOPIXELS  (via drill 0.25)
  Top 0.254: R13.2 91.3,72.48 v91.69,72.87 | v96.91,66.19 95.29,64.57 95.29,60.52 95.67,60.14 95.67,37.03 91.75,33.11 91.75,29.51 v93.06,28.2 | v95.97,25.32 96.27,25.02 U$3.39-A15/CS/OUT1A
  Bottom 0.254: v96.91,66.19 96.91,67.52 91.69,72.74 v91.69,72.87 | v93.06,28.2 95.95,25.32 v95.97,25.32
ON/OFF-BUTTON  (via drill 0.25)
  Top 0.254: v69.84,70.73 68.15,70.73 64.59,67.17 41.38,67.17 v38.42,70.13 | v31.11,63.58 28.05,60.51 17.16,60.51 v14.93,62.74 | v93.23,66.19 93.23,65.63 93.12,65.52 93.12,45.87 v93.28,45.72 | v9.09,67.82 8.15,68.76 ON/OFF_SW.1
  Bottom 0.254: v69.84,70.73 70.4,71.29 90.01,71.29 93.23,68.07 v93.23,66.19 | v31.11,63.58 31.12,63.58 31.4,63.58 36.78,68.97 37.26,68.97 v38.42,70.13 | v93.28,45.72 93.66,45.34 U$3.17-A3/TX4/SDA1 | v9.09,67.82 14.17,62.74 v14.93,62.74
S0  (via drill 0.25)
  Top 0.254: v43.08,70.04 43.64,70.04 46.35,72.75 62.7,72.75 66.46,76.51 84.84,76.51 86.06,75.29 91.15,75.29 v95.24,71.2 | v98.02,66.17 99.06,65.13 99.06,61.15 96.38,58.48 96.38,44.99 v96.48,44.89 | v39.31,56.09 39.33,56.08 U$1.10
  Bottom 0.254: J4.4 10.38,20.72 11.68,22.02 11.68,57.74 13.74,59.8 31.14,59.8 | 31.14,59.8 37.82,66.49 39.22,66.49 41.94,69.21 42.24,69.21 43.06,70.04 v43.08,70.04 | v95.24,71.2 98.02,68.41 v98.02,66.17 | v39.31,56.09 35.6,59.8 31.14,59.8 | v96.48,44.89 98.57,42.8 U$3.16-A2/RX4/SCL1
S1  (via drill 0.25)
  Top 0.254: v41.78,70.06 v42.8,69.04 43.66,69.04 46.63,72.01 62.97,72.01 66.75,75.8 84.55,75.8 86.5,73.85 v86.5,73.57 | v96.26,66.18 96.26,66.05 94.92,64.71 94.92,60.37 95.25,60.04 95.25,44.58 v95.22,44.55 | U$1.11 38.68,56.29 v39.23,56.84
  Bottom 0.254: J4.2 10.34,22.72 10.97,23.34 10.97,58.04 13.44,60.51 30.84,60.51 37.53,67.2 38.92,67.2 v41.78,70.06 | v86.5,73.57 86.68,73.4 90.49,73.4 96.26,67.63 v96.26,66.18 | v95.22,44.55 99.51,40.26 U$3.15-A1/RX3/SPDIF_IN | v39.23,56.84 39.24,56.82 39.85,56.82 41.83,58.8 41.83,68.08 v42.8,69.04
S2  (via drill 0.25)
  Top 0.254: v94.51,33.53 98.37,33.53 99.39,34.55 99.39,36.43 100.66,37.7 U$3.14-A0/TX3/SPDIF_OUT 98.08,40.3 v98.08,57.37 | U$1.14 38.68,48.46 39.52,49.3 42.14,49.3 51.49,58.65 51.49,59.61 52.09,60.2 v52.09,60.34 | v92.69,75.68 95.03,75.68 99.57,71.13 99.57,67.48 100.1,66.94 101.2,66.94 101.63,66.51 101.63,60.03 100.96,59.36 v100.07,59.36
  Bottom 0.254: J3.4 92.48,33.53 v94.51,33.53 | v52.09,60.34 52.09,67.12 60.76,75.8 68.34,75.8 69.05,75.09 84.11,75.09 84.82,75.8 92.57,75.8 v92.69,75.68 | v100.07,59.36 v98.08,57.37
S3  (via drill 0.25)
  Top 0.254: U$3.38-A14/CS/IN1 98.5,24.64 95.86,24.64 v95.61,24.9 | U$1.13 38.03,48.55 39.14,49.66 42,49.66 51.13,58.8 51.13,59.95 v51.53,60.34 | v93.78,75.22 94.98,75.22 99.11,71.09 99.11,70.73 v99.09,70.71 | v94.13,34.35 96.38,36.6 96.38,43.51 96.95,44.07 96.95,45.27 96.74,45.48 96.74,58.33 99.41,61 99.41,65.28 98.71,65.98 v98.71,66.12 | J3.5 91.4,33.44 91.4,29.08 v92.69,27.8
  Bottom 0.254: v51.53,60.34 51.53,67.07 60.62,76.15 68.49,76.15 69.2,75.44 83.97,75.44 84.67,76.15 92.85,76.15 v93.78,75.23 v93.78,75.22 | v94.13,34.35 94,34.35 93.84,34.52 J3.5 | v92.69,27.8 95.58,24.9 v95.61,24.9 | v98.71,66.12 98.71,70.33 v99.09,70.71
  other vias: 92.47,34.52
SCHUSS_1  (via drill 0.25)
  Top 0.254: J5.8 67.28,50.97 67.28,59.94 70.31,62.98 83.14,62.98 84.51,61.6 86.2,61.6 87.75,60.04 87.75,54.37 88.23,53.89 88.23,19.67 90.69,17.2 v92.02,17.2 | v96.47,17.2 100.46,17.2 U$3.36-PWM
  Bottom 0.254: v92.02,17.2 v96.47,17.2
SCHUSS_2  (via drill 0.25)
  Top 0.254: J5.10 67.99,52.26 67.99,59.65 70.61,62.27 82.84,62.27 83.97,61.14 83.97,54.79 84.82,53.94 87.13,53.94 87.52,53.55 87.52,18.85 89.72,16.65 v92.02,16.65 | v96.47,16.65 98.87,16.65 U$3.35-TX8
  Bottom 0.254: v92.02,16.65 v96.47,16.65
SPI_MISO  (via drill 0.25, 0.36)
  Top 0.254: v33.73,71.5 33.78,71.5 39.53,65.75 65.5,65.75 71.8,72.05 78.59,72.05 79.34,71.3 87.14,71.3 89.19,69.25 89.19,67.27 91.69,64.77 91.69,54.51 91.57,54.38 v91.57,54.36 | v91.1,53.38 91.1,44.18 89.85,42.93 89.85,37.46 v89.04,36.66
  Bottom 0.254: v91.57,54.36 91.57,53.85 v91.1,53.38 | v89.04,36.66 87.56,35.18 U$3.12-MISO/MQSL
  Bottom 0.356: U$4.7 22.04,71.5 v33.73,71.5
SPI_MOSI  (via drill 0.25, 0.36)
  Top 0.254: v33.73,69.54 33.85,69.54 38.7,64.69 65.94,64.69 72.24,70.99 78.15,70.99 78.9,70.24 86.7,70.24 88.13,68.81 88.13,66.83 90.6,64.36 90.6,55.2 90.29,54.88 90.29,44.37 88.94,43.02 88.94,39.35 v89.04,39.25
  Bottom 0.254: v89.04,39.25 87.51,37.72 U$3.11-MOSI/CTX1
  Bottom 0.356: U$4.6 19.63,66.55 22.81,66.55 25.79,69.54 v33.73,69.54
SPI_SCK  (via drill 0.25, 0.36)
  Top 0.254: v33.73,70.19 33.85,70.19 39,65.05 65.8,65.05 72.09,71.34 78.3,71.34 79.04,70.59 86.85,70.59 88.48,68.96 88.48,66.98 90.98,64.48 90.98,55.03 90.64,54.69 90.64,44.23 89.49,43.07 89.49,37.75 v89.39,37.65
  Bottom 0.254: U$3.13-SCK/LED 100.28,34.8 94.06,34.8 93.35,35.51 91.53,35.51 v89.39,37.65
  Bottom 0.356: U$4.5 22.3,67.82 24.67,70.19 v33.73,70.19
T_EN  (via drill 0.25)
  Top 0.254: v91.45,66.27 91.53,66.27 92.42,65.38 92.42,44.03 90.2,41.82 90.2,36.42 v89.04,35.26 | v68.3,69.19 65.21,66.11 40.46,66.11 v36.43,70.14 | v31.11,65.54 31.11,65.5 27.19,61.57 17.75,61.57 16.33,63 16.33,64.01 v16.2,64.14 | Q4.1 14.42,67.92 v14.42,66.93
  Bottom 0.254: v91.45,66.27 91.45,68.27 89.55,70.17 70.95,70.17 69.97,69.19 v68.3,69.19 | v36.43,70.14 36.43,70.12 31.85,65.53 v31.12,65.53 v31.11,65.54 | U$3.3V3-1 85.98,32.64 86.25,32.91 86.69,32.91 v89.04,35.26 | v14.42,66.93 14.42,65.92 v16.2,64.14

## Text on the board
tNames: ON/OFF | Team Faabs / 2024/2025 Open